# Altium PCB Microphone1.PcbDoc
Units mil, origin at the board's own origin, x right, y up, seen from the top; angles counter-clockwise.
Board outline 510 x 635 mil, 4 copper layers (Top Layer, GND, Signal Layer, Bottom Layer), stack 30.634 mil thick; 26 components, 20 nets, 71 pads, 16 vias.
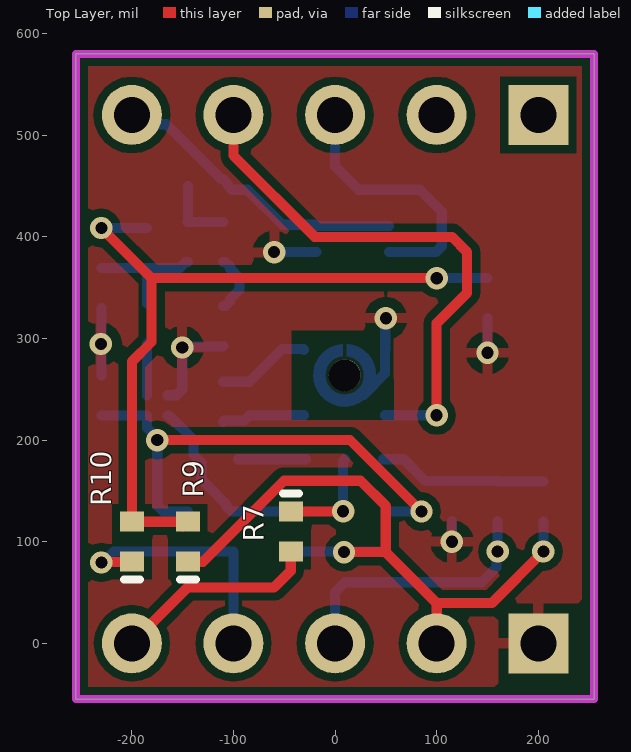
[diagram p0: Top Layer view]
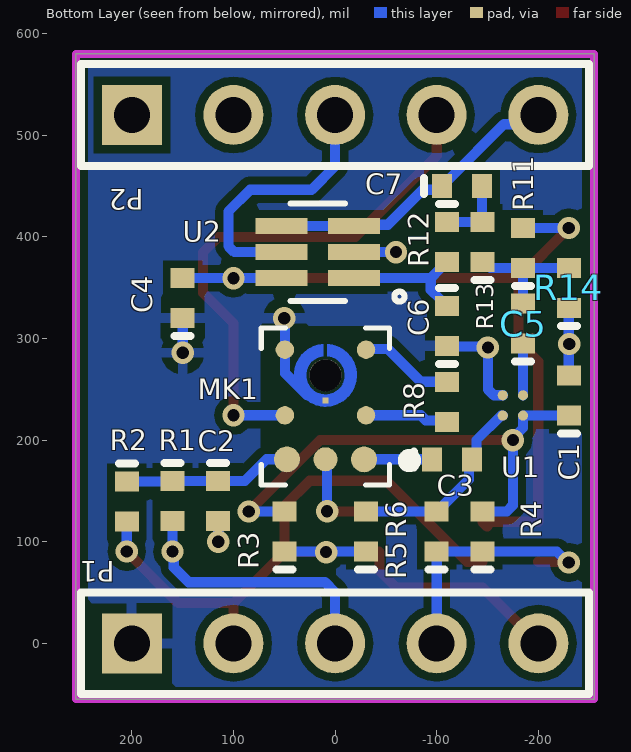
[diagram p1: Bottom Layer view, seen from below]
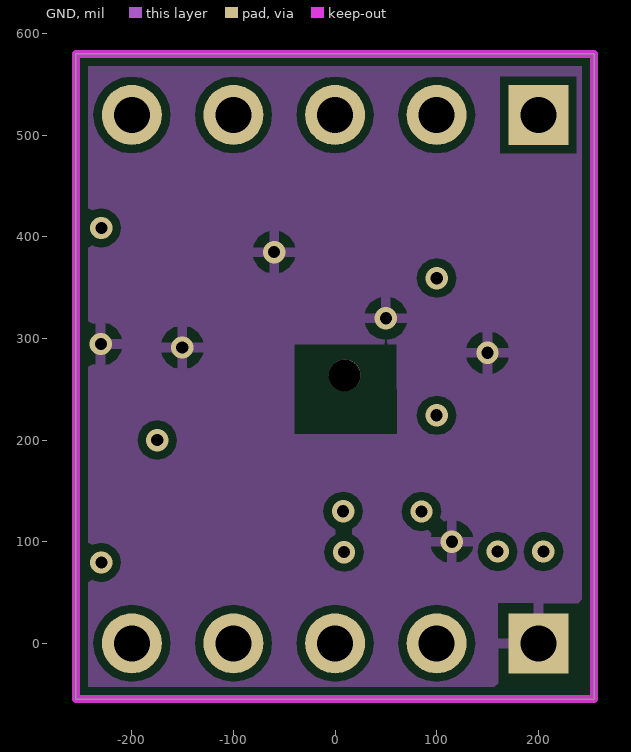
[diagram p2: GND]
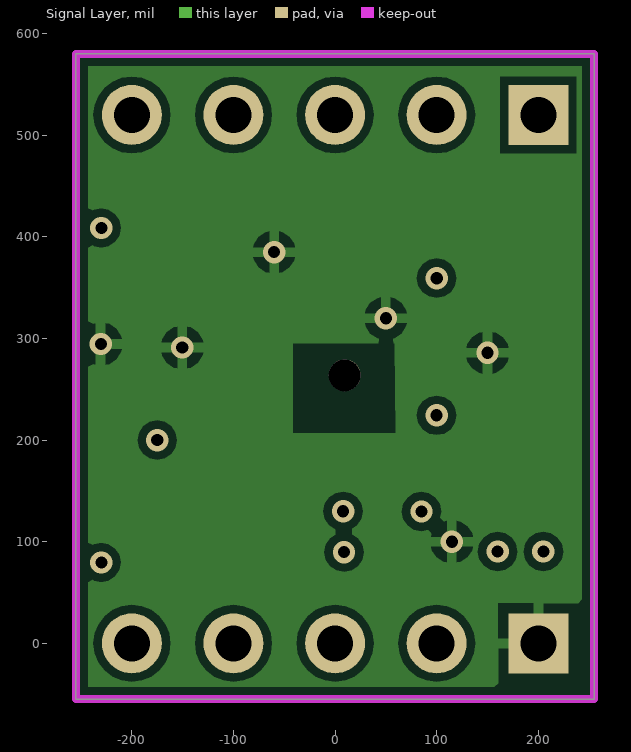
[diagram p3: Signal Layer]

## Layer stack, top to bottom
Top Solder: solder mask 0.4, Solder Resist, Dk 3.5
Top Layer: signal copper 1.4
Dielectric 1: core 10, FR-4, Dk 4.2
GND: signal copper 1.417
Dielectric 3: prepreg 5, Dk 4.2
Signal Layer: signal copper 1.417
Dielectric 2: core 10, Dk 4.2
Bottom Layer: signal copper 1.4
Bottom Solder: solder mask 0.4, Solder Resist, Dk 3.5

## Board outline
-255,-55 -255,580 255,580 255,-55

## Design rules (kind name [scope] priority, off if disabled: settings)
Clearance Clearance_poly [InPolygon] p1: gap=8 ignorepadtopadclearanceinfootprint=TRUE
Clearance Clearance_1 [HasFootprint('*MIC_PMM-3738-VM1010-R')] p2: gap=6 ignorepadtopadclearanceinfootprint=FALSE except(0: Arc-Hole Track-Hole SMDPad-Hole THPad-Hole Via-Hole Fill-Hole Poly-Hole Region-Hole Text-Hole; 2: SMDPad-Region THPad-Region)
Clearance [All] p3: gap=6 ignorepadtopadclearanceinfootprint=TRUE
MinimumSolderMaskSliver [All] p1: minsoldermaskwidth=1
PolygonConnect [All] p1: connectstyle=Relief reliefconductorwidth=10 reliefentries=4 polygonreliefangle="90 Angle" airgapwidth=10
RoomDefinition Microphone1 [InComponentClass('Microphone1')] p1 off: confinementstyle=ConfineIn formatcopy=TRUE lockcomponents=FALSE outline -158.94,-68.94 -158.94,658.94 268.94,658.94 268.94,-68.94
RoutingVias [All] p1: holewidth=9.84 width=19.68 viastyle="Through Hole" minholewidth=7.87 minwidth=17.72 maxholewidth=19.68 maxwidth=39.37
SilkToSilkClearance [All] p1: silktosilkclearance=1
SilkToSolderMaskClearance [IsPad] p1: minsilkscreentomaskgap=1 clearancetoexposedcopper=TRUE
SolderMaskExpansion [All] p1: expansion=4 istentingtop=FALSE
Width [All] p1: maxlimit=10 minlimit=6 preferedwidth=10
27 further rules are at their usual default settings.

## Components (designator, comment, footprint, x,y, rotation, side; value= is the part's Value field where it differs from the comment)
C1 "0.1uF" 0402 -230,243.76 r90 bottom
C2 "0.1uF" 0402 115,140 r270 bottom
C3 "2.2uF" 0402 -115.31,181.06 r180 bottom
C4 "0.1uF" 0402 150,339.68 r90 bottom
C5 "0" 0402 -185,314.69 r90 bottom
C6 "1nF" 0402 -110,312.43 r270 bottom
C7 "2nF" 0402 -125,450 r180 bottom
MK1 "PMM-3738-VM1010-R" MIC_PMM-3738-VM1010-R 9.45,235 r0 bottom
P1 "Header 5" HDR1X5 200,0 r180 bottom
P2 "Header 5" HDR1X5 200,520 r180 bottom
R1 "Res" 0402 160,140 r270 bottom value=0
R2 "Res" 0402 205,139.69 r270 bottom value=DNP
R3 "DNP" 0402 50,110 r90 bottom
R4 "0" 0402 -145,110 r90 bottom
R5 "DNP" 0402 -30.51,110 r90 bottom
R6 "2.2k" 0402 -100,110 r90 bottom
R7 "0" 0402 -43.16,110 r270 top
R8 "26.1k" 0402 -110.16,237.7 r270 bottom
R9 "DNP" 0402 -145,100 r90 top
R10 "0" 0402 -200,100 r90 top
R11 "DNP" 0402 -185,389.06 r90 bottom value=1M
R12 "22k" 0402 -110,395 r270 bottom
R13 "22k" 0402 -145,395 r90 bottom
R14 "DNP" 0402 -230,349.69 r90 bottom value=1M
U1 "LMV1032URX-25/NOPB" BGA4C2X2X50P_117X117X42 -175,234.08 r180 bottom
U2 "MAX9911EXT" MAX9911EXT 17.14,385 r0 bottom

## Footprints (in the part's own frame and the unit in brackets; to place one, negate y for a bottom-side part, rotate by r counter-clockwise, add the part's x,y. Pads: shape width x height; smd on the part's side, far side on the other; paste and mask are expansions set on the pad)
0402 [mm] "Surface Mount; Body 1 x 0.5 mm (LxW typ)"
  rect 0.5x0.6 smd: 1(-0.5,0) 2(0.5,0)
  silkscreen extent -0.95,-0.2 -0.95,0.2, body extent -0.5,-0.25 0.5,0.25, height 0.5
BGA4C2X2X50P_117X117X42 [mil]
  round 10 smd: A1(-10,10) A2(10,10) B1(-10,-10) B2(10,-10)
HDR1X5 [mm] "Connector; Header; 5 Position"
  rect 1.5x1.5 hole 0.9: 1(0,0)
  round 1.5 hole 0.9: 2(2.54,0) 3(5.08,0) 4(7.62,0) 5(10.16,0)
  silkscreen extent -1.27,-1.27 11.43,1.27
MAX9911EXT [mm]
  rect 1.3x0.4 smd: 1(-0.905,0.65) 2(-0.905,0) 3(-0.905,-0.65) 4(0.91,-0.65) 5(0.91,0) 6(0.91,0.65)
  silkscreen extent -2.17,-1.22 0.68,1.24
MIC_PMM-3738-VM1010-R [mm]
  round 0.65 smd: 1(-0.965,1.37) 6(0.965,1.37)
  round 0.46 smd: 2(-1.015,0.27) 3(-1.015,-1.37) 4(1.015,-1.37) 5(1.015,0.27)
  round 0.6 smd: 7(0,1.37)
  rect 0.15x0.15 smd: 8(0,-0.1)
  round 0.8 hole 0.8 unplated: None(0,-0.73)
  Top Layer region: 258 vertices and 0 holes, not listed, extent -0.78,-1.51 0.78,0.05
  silkscreen extent -2.24,-1.92 1.61,2.01

## Part data
C1 C2 C4: library part Cap, "Ceramic Capacitor (Surface Mount)", Digi-Key Part Number=490-4759-1-ND, Manufacturer="Murata Electronics North America", Manufacturer Part Number=GCM155R71C104KA55D, Rating=16V, Note="CAP CER 0.1UF 16V X7R 0402"
C3 C5: library part Cap, "Ceramic Capacitor (Surface Mount)", Digi-Key Part Number=311-0.0JRCT-ND, Manufacturer=Yageo, Manufacturer Part Number=RC0402JR-070RL
C6: library part Cap, "Ceramic Capacitor (Surface Mount)", Digi-Key Part Number=490-4761-1-ND, Manufacturer="Murata Electronics", Manufacturer Part Number=GCM155R71H102KA37D, Rating=50V, Note="CAP CER 1000PF 50V X7R 0402"
C7: library part Cap, "Ceramic Capacitor (Surface Mount)", Digi-Key Part Number=478-10122-1-ND, Manufacturer="AVX Corporation", Manufacturer Part Number=04025C202JAT2A
MK1: "MEMS Microphone Omni-Directional 700 Ohm -38dBV 1.8V Rectangular Solder Pad T/R", Digi-Key Part Number=2022-1001-1-ND, Manufacturer="Vesper Technologies Inc.", Manufacturer Part Number=VM1010, Notes="PIEZOELETRIC MEMS MIC SINGLE-END"
P1 P2: "Header, 5-Pin", LatestRevisionDate=17-Jul-2002, LatestRevisionNote="Re-released for DXP Platform.", Publisher="Altium Limited"
R1 R2: "Chip Resistor (Surface Mount)", Manufacturer="Generic Chip Res (TBD)"
R3 R4 R5 R6 R7 R9 R10: library part Res, "Chip Resistor (Surface Mount)", Digi-Key Part Number=311-0.0JRCT-ND, Manufacturer=Yageo, Manufacturer Part Number=RC0402JR-070RL
R8: library part Res, "Chip Resistor (Surface Mount)", Digi-Key Part Number=311-26.1KLRCT-ND, Manufacturer=Yageo, Manufacturer Part Number=RC0402FR-0726K1L
R11 R14: library part Res, "Chip Resistor (Surface Mount)", Digi-Key Part Number=311-1.00MLRCT-ND, Manufacturer=Yageo, Manufacturer Part Number=RC0402FR-071ML
R12 R13: library part Res, "Chip Resistor (Surface Mount)", Digi-Key Part Number=YAG4210CT-ND, Manufacturer=Yageo, Manufacturer Part Number=RT0402BRD0722KL
U1: "Analog input microphone preamplifier for 3-wire electret microphones", Package="DSBGA-4 Texas Instruments", Availability="In Stock", Check_prices=https://www.snapeda.com/parts/LMV1032URX-25/NOPB/Texas+Instruments/view-part/?ref=eda, MF="Texas Instruments", MP=LMV1032URX-25/NOPB, Price=None, Purchase-URL=https://pricing.snapeda.com/search/part/LMV1032URX-25/NOPB/?ref=eda, SnapEDA_Link=https://www.snapeda.com/parts/LMV1032URX-25/NOPB/Texas+Instruments/view-part/?ref=snap
U2: "Operational amplifier; 1.8Ã·5.5VDC; Channels: 1; SC70-6", Case/Package=SC, Input Bias Current=1pA, Input Offset Voltage (Vos)=200uV, Manufacturer=Maxim, Manufacturer Part Number=MAX9911EXT+T, Max Frequency=1kHz, Max Operating Temperature=85°C, Max Power Dissipation=245mW, Max Supply Voltage=5.5V, Min Operating Temperature=-40°C, Min Supply Voltage=1.8V, Nominal Supply Current=4uA, Output Current=15mA, Package Quantity=2500, Supplier Part Number 1=MAX9911EXT+TCT-ND, Voltage Gain=120dB, Bandwidth=200kHz, Common Mode Rejection Ratio=70dB, ComponentLink1Description=https://datasheets.maximintegrated.com/en/ds/MAX9910-MAX9913.pdf?src-supplier=Digi-Key, ComponentLink1URL=https://datasheets.maximintegrated.com/en/ds/MAX9910-MAX9913.pdf?src-supplier=Digi-Key, ComponentLink2Description=https://media.digikey.com/pdf/Data%20Sheets/Maxim%20PDFs/PartNumberBreakdown_ds.pdf?src-supplier=Digi-Key, ComponentLink2URL=https://media.digikey.com/pdf/Data%20Sheets/Maxim%20PDFs/PartNumberBreakdown_ds.pdf?src-supplier=Digi-Key, ComponentLink3Description=http://datasheets.maxim-ic.com/en/ds/MAX9910-MAX9913.pdf?src-supplier=Avnet+Europe, ComponentLink3URL=http://datasheets.maxim-ic.com/en/ds/MAX9910-MAX9913.pdf?src-supplier=Avnet+Europe, Contact Plating=Gold, Gain Bandwidth Product=200kHz, Height=1mm, Lead Free="Lead Free", Length=2.15mm, Mount="Surface Mount", Number of Amplifiers=1, Number of Channels=1, Number of Circuits=1, Number of Pins=6, Operating Supply Current=4uA, Output Current per Channel=15mA, Packaging="Tape and Reel", Pricing 1="1=1, 10=0.893, 25=0.848, 100=0.6511, 250=0.57536, 500=0.54508, 1000=0.51912 (USD)", Radiation Hardening=No, REACH SVHC="No SVHC", Slew Rate=0.1V/µs, Stock 1=3380, Supplier 1=Digi-Key, Width=1.35mm

## Via types
v1: diameter 22, hole 12, Top Layer to Bottom Layer, tented both sides, 16 vias

## Nets (pads, with @x,y where several pads share a name; then routed paths per layer and width w, separated by ;. In a path a pad name is that pad's centre, name@x,y a point inside that pad or via, vN(x,y) a via of type N, cw(c..) or ccw(c..) an arc to the next point about the centre after c; other vN are vias at no path point)
Amp_out: C5.1 U1.A2 | length 50.9
  Bottom Layer w10: U1.A2 C5.1
amplf-pwr: P1.4 R4.1 R6.1 R10.1 | length 255.1
  Top Layer w10: v1(-230,79.54) -229.44,80.1 -200.21,80.1 R10.1
  Bottom Layer w10: v1(-230,79.54) -228.92,79.54 -218.14,90.31 R4.1 R6.1 P1.4
Audio_Out: C7.1 P2.5 U2.3 U2.4 | length 299.4
  Bottom Layer w10: P2.5 -190.86,510.86 -166.17,510.86 -112.13,456.81 -110.16,456.81 -105.32,451.97 C7.1 -101.75,446.44 -86.33,446.44 -51.83,411.93 -19.83,411.93 U2.3 U2.4
Filter_EN: P2.3 U2.5 | length 262.5
  Bottom Layer w10: P2.3 0,469.5 23.07,446.44 83.56,446.44 105,425 105,390.86 99.14,385 U2.5
GND: C1.2 C2.2 C4.1 C6.2 MK1.4 MK1.8 P1.1 R14.1 U1.A1 U2.2 | length 346.1
  Bottom Layer w10: C1.2 R14.1 ; U1.A1 -156.26,244.08 -150.4,249.94 v1(-150.4,291.16) -149.31,292.26 -110.48,292.26 C6.2 ; v1(-60,385) U2.2 ; 28.2,244.66 49.17,265.63 49.17,288.69 MK1.4 49.41,319.41 v1(50,320) ; v1(115,100) C2.2 ; v1(150,285.92) C4.1
  other v1: -230.53,294.54
Mic-pwr: P1.3 R1.2 | length 265.3
  Bottom Layer w10: P1.3 0,50.18 9.82,60 144.14,60 158.84,74.7 158.84,89.16 v1(160,90.31) R1.2
Mode: MK1.5 P2.4 | length 533
  Top Layer w10: P2.4 -100,480 -20,400 115,400 130,385 130,345 99.96,314.96 v1(99.96,224.37)
  Bottom Layer w10: MK1.5 v1(99.96,224.37)
NetC1_1: C1.1 R3.2 R4.2 U1.B2 | length 494.1
  Top Layer w10: v1(-175,200) 14.69,200 v1(85,129.69)
  Bottom Layer w10: C1.1 U1.B2 -185,211.86 -175,201.86 v1(-175,200) -175,135.7 -169.14,129.84 -145.16,129.84 R4.2 ; R3.2 v1(85,129.69)
NetC2_1: C2.1 MK1.6 R1.1 R2.1 | length 166.5
  Bottom Layer w10: MK1.6 67.51,181.06 88.88,159.69 C2.1 R1.1 160.31,159.37 R2.1
NetC3_1: C3.1 MK1.1 | length 67.1
  Bottom Layer w10: C3.1 MK1.1
NetC3_2: C3.2 R5.2 R6.2 U1.B1 | length 193
  Bottom Layer w10: U1.B1 -163.31,224.08 -139.23,200 -139.23,185.29 C3.2 -131.76,177.82 -131.76,161.44 -106.81,136.5 -106.81,134.53 -101.97,129.69 R6.2 R5.2
NetC4_2: C4.2 R9.2 R10.2 R11.2 U2.6 | length 802.1
  Top Layer w10: v1(-230,408.74) -180.63,359.37 ; R9.2@-149.84,114.84 R9.2 R10.2 -200,277.17 -180.63,296.54 -180.63,359.37 ; v1(100,359.37) -180.63,359.37
  Bottom Layer w10: v1(-230,408.74) R11.2 ; U2.6 v1(100,359.37) v1(100,359.37) C4.2
NetC5_2: C5.2 R11.1 R13.1 R14.2 | length 122.5
  Bottom Layer w10: R14.2 R11.1 ; C5.2 R11.1 ; R13.1 -146.97,375.32 -152.91,369.37 R11.1
NetC6_1: C6.1 R12.2 U2.1 | length 134.3
  Bottom Layer w10: C6.1 -108.03,332.11 -103.19,336.95 -103.19,338.92 -94.09,348.02 -94.09,359.41 ; R12.2 -108.03,375.32 -103.19,370.47 -103.19,368.51 -94.09,359.41 ; U2.1 -94.09,359.41
NetC7_2: C7.2 R12.1 R13.2 | length 70.4
  Bottom Layer w10: C7.2 -144.69,415 R13.2 R12.1
NetMK1_2: MK1.2 R8.2 | length 82.3
  Bottom Layer w10: R8.2 -108.77,219.41 -89.21,219.41 -84.25,224.37 MK1.2
NetMK1_3: MK1.3 R8.1 | length 93.4
  Bottom Layer w10: R8.1 -84.23,257.39 -51.83,289.79 -31.37,289.79 MK1.3
NetMK1_7: MK1.7 R7.1 | length 102.9
  Top Layer w10: R7.1 7.56,129.69 v1(7.88,130)
  Bottom Layer w10: v1(7.88,130) 7.88,179.49 MK1.7
Trigger: P1.5 R7.2 | length 205.1
  Top Layer w10: P1.5 -145,55 -60,55 -43.67,71.33 -43.67,89.8 R7.2
VREG: P1.2 R2.2 R3.1 R5.1 R9.1 | length 672.4
  Top Layer w10: R9.1@-144.22,79.54 R9.1 -130,80.31 -50.31,160 25,160 49.8,135.2 49.8,89.74 ; v1(8.83,89.74) 49.8,89.74 ; P1.2 100,39.54 ; v1(205,90.31) 154.22,39.54 100,39.54 ; 49.8,89.74 100,39.54
  Bottom Layer w10: R5.1 R3.1 ; v1(205,90.31) R2.2
pads on no net: MK1.None P2.1 P2.2

## Polygon pours and split planes (outlines as drawn)
GND on Bottom Layer "Bottom Layer-GND" (solid, pour order 0): 260,580 260,-55 -255,-55 -255,580
GND on Signal Layer "Signal Layer-GND" (solid, pour order 2): 260,580 260,-55 -255,-55 -255,580
GND on Top Layer "Top Layer-GND" (solid, pour order 4): 260,570 260,-55 -255,-55 -255,570
GND on GND "GND-GND" (solid, pour order 6): 260,580 260,-55 -255,-55 -255,580

## Keep-outs
Keep-Out Layer:
  the board outline again, w7.87

## Other copper
Top Layer:
  pour cut-out: 57.13,307.49 -42.51,307.49 -42.51,219.99 57.87,219.99
GND:
  pour cut-out: 60.05,293.75 -39.58,293.75 -39.58,206.25 60.8,206.25
Signal Layer:
  pour cut-out: 58.28,294.91 -41.36,294.91 -41.36,207.41 59.02,207.41
Bottom Layer:
  pour cut-out: 73.73,312.43 73.73,150.79 70.75,147.81 -51.7,147.81 -51.7,311.28 -50.55,312.43

## Silkscreen, mask and mechanical layers (free items; w line width, h text height)
Mechanical 1:
  lines w10: -255,-55 255,-55 255,579.73 -255,580.55 -255,-55